# EAGLE board SolarCellX_v2alt (EAGLE 9.2.2)
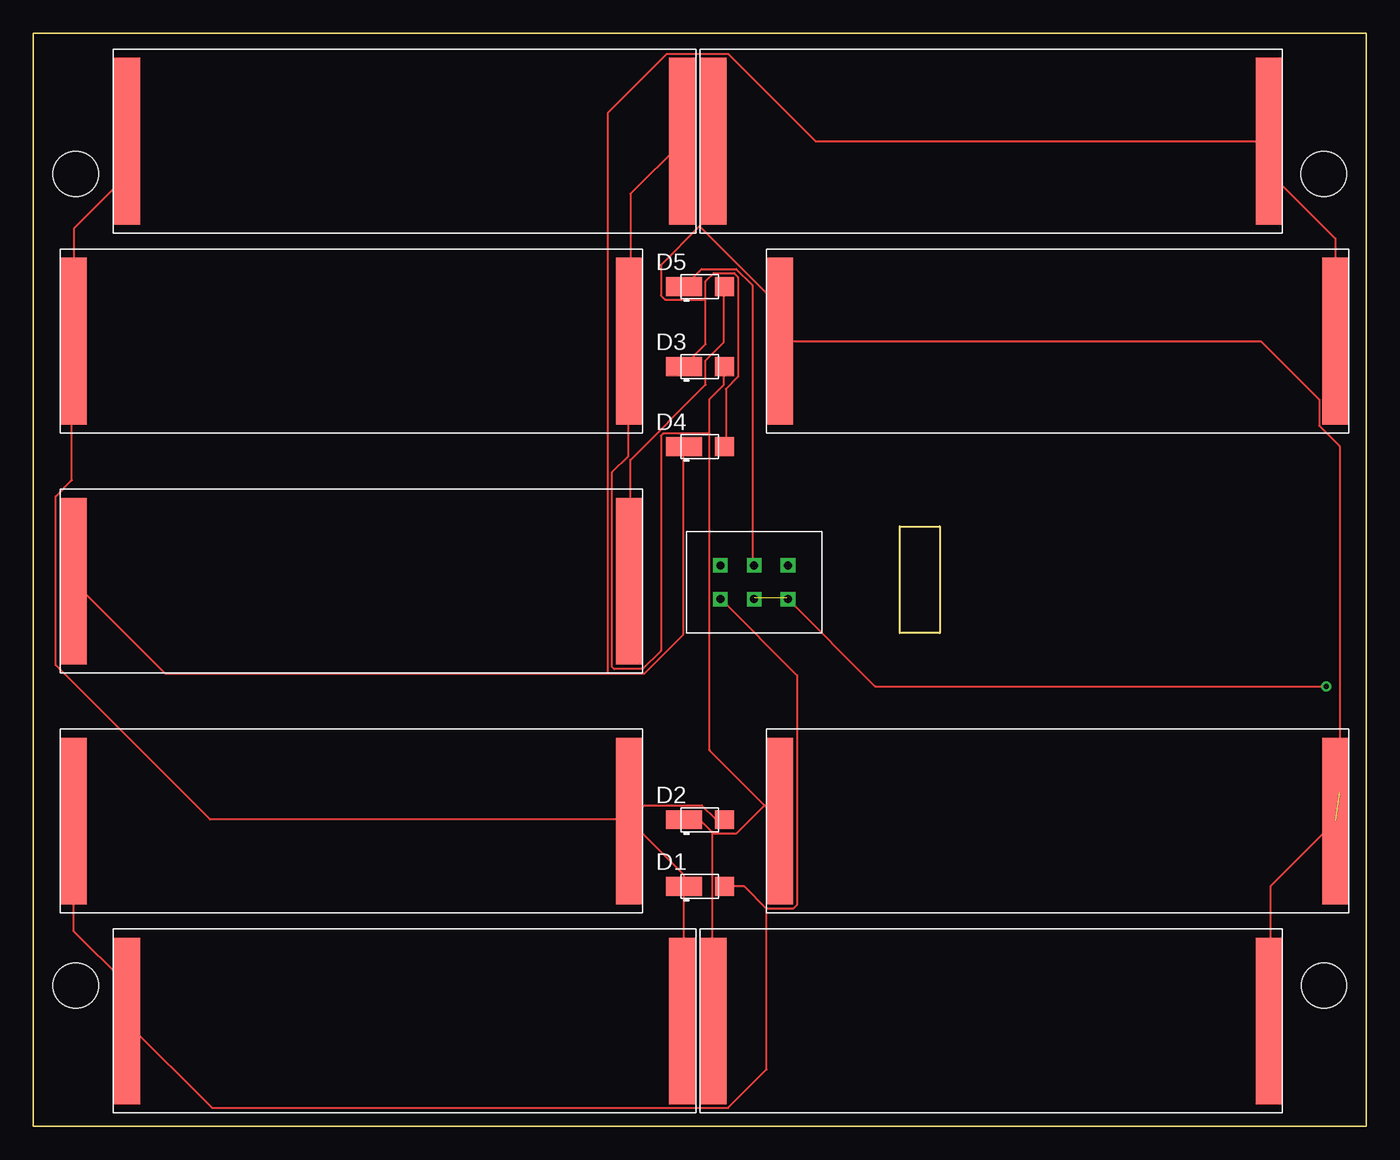
[diagram p0: board, top side]
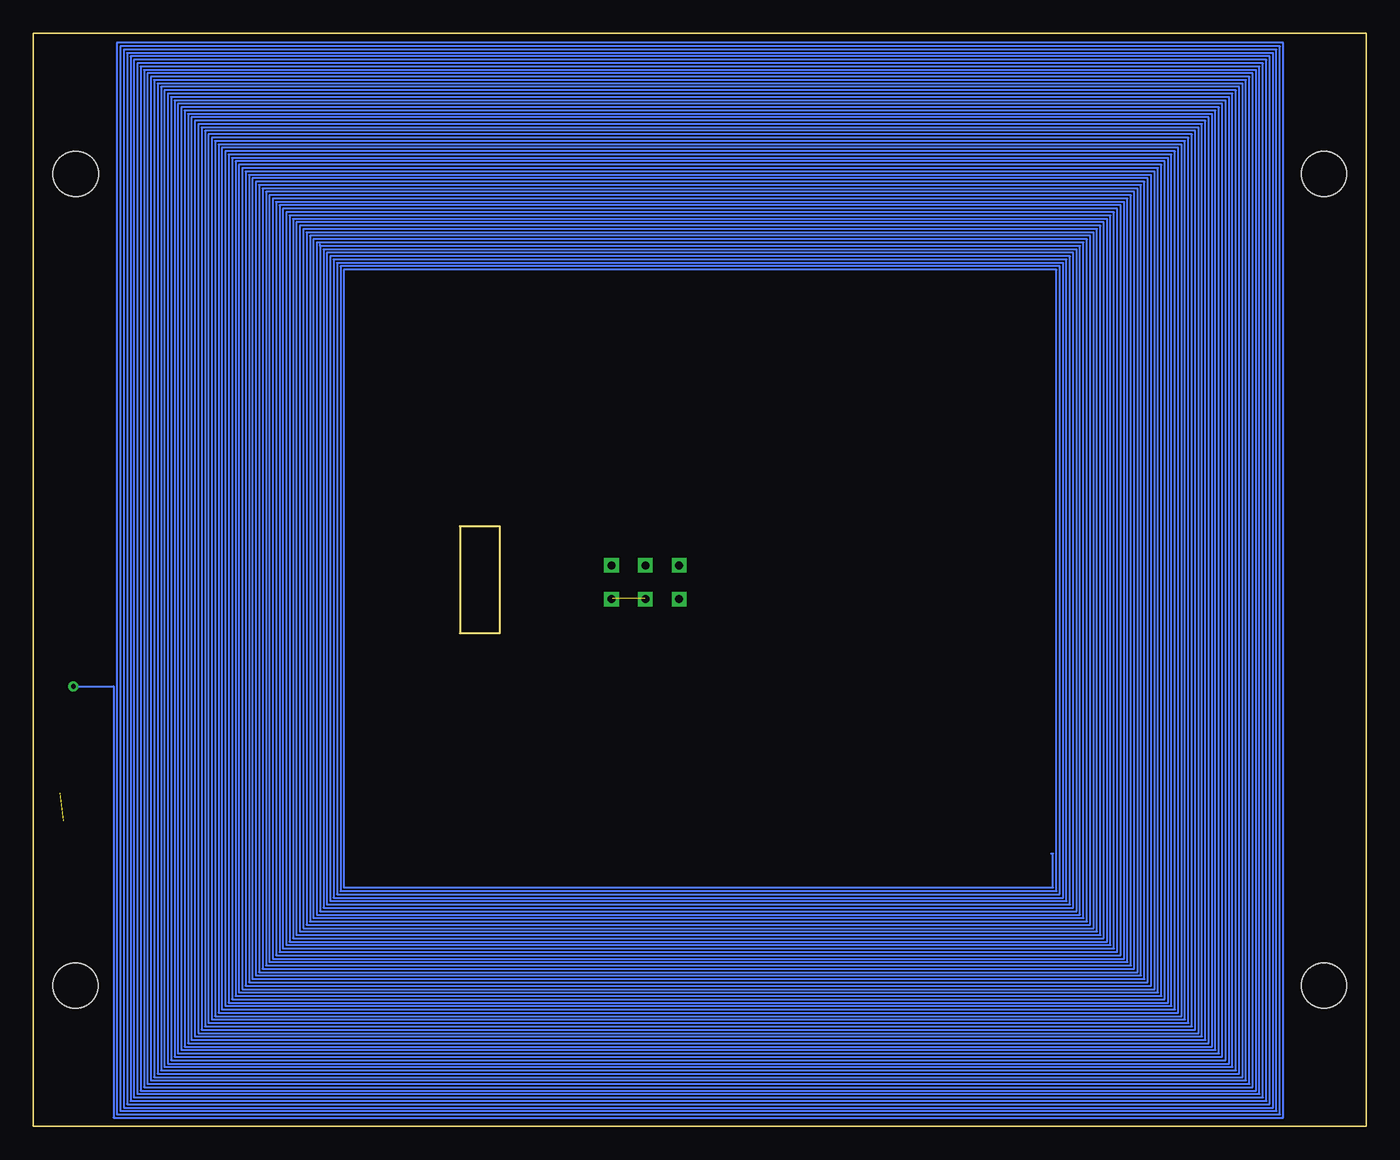
[diagram p1: board, bottom side, seen from below]

Size 100 x 82 mm. Coordinates in mm from the lower left corner, seen from the top.
Outline: 0,0 0,82 100,82 100,0 0,0
Outline: 65,45 68,45 68,37 65,37 65,45
Copper layers ([2:1+2*15+16:15]): Top 0.035559375mm / dielectric 0.17018125mm / Route2 0.01778125mm / dielectric 47mil / Route15 0.01778125mm / dielectric 0.17018125mm / Bottom 0.035559375mm
Design rules "default *": minimum track width 6mil, minimum drill 0.35mm, track to track 5mil, track to pad 6mil, pad to pad 6mil, via to via 6mil, smd to smd 6mil, copper to edge 20mil, drill to drill 6mil, minimum pad ring 10mil, minimum via ring 8mil, stop-mask expansion 4mil, vias tented up to drill 0mil, thermal gap 10mil
Holes 3.4 mm at 3.17,10.55 96.82,71.45 3.17,71.45 96.83,10.55

## Footprints (pad centres in the part's own frame; a part is rotated, then mirrored left to right if it is on the bottom)
SLMD121H04L = smd 2 x 12.5: P$1 1,6.9; P$2 42.7,6.9
SB_DIODE = smd 2.7 x 1.4: NEG -1.2,0 | smd 1.4 x 1.4: POS 1.85,0
6PIN_MOLEX = drill 0.6 square: P$1 2.54,2.54; P$2 5.08,2.54; P$3 7.62,2.54; P$4 7.62,5.08; P$5 5.08,5.08; P$6 2.54,5.08

## Placement (x,y rotation side)
1  SLMD121H04L  [SLMD121H04L]  2,34 0 top
11  SLMD121H04L  [SLMD121H04L]  6,1 0 top
12  SLMD121H04L  [SLMD121H04L]  2,16 0 top
13  SLMD121H04L  [SLMD121H04L]  2,52 0 top
14  SLMD121H04L  [SLMD121H04L]  6,67 0 top
21  SLMD121H04L  [SLMD121H04L]  50,1 0 top
22  SLMD121H04L  [SLMD121H04L]  55,16 0 top
23  SLMD121H04L  [SLMD121H04L]  55,52 0 top
24  SLMD121H04L  [SLMD121H04L]  50,67 0 top
D1  SB_DIODE  [SB_DIODE]  50,18 0 top
D2  SB_DIODE  [SB_DIODE]  50,23 0 top
D3  SB_DIODE  [SB_DIODE]  50,57 0 top
D4  SB_DIODE  [SB_DIODE]  50,51 0 top
D5  SB_DIODE  [SB_DIODE]  50,63 0 top
U$1  6PIN_MOLEX  [6PIN_MOLEX]  49,37 0 top

## Library data of the parts
1 11-14 21-24 D1-D5 U$1 = Solar

## Nets
GND: 11.P$1 12.P$1 D1.POS U$1.P$1
N$1: U$1.P$2 U$1.P$3
N$2: 11.P$2 12.P$2 13.P$1 14.P$1 D1.NEG D2.POS
N$3: 13.P$2 14.P$2 21.P$1 22.P$1 D2.NEG D3.POS
N$4: 1.P$1 23.P$2 24.P$2 D4.NEG
N$5: 21.P$2 22.P$2 23.P$1 24.P$1 D3.NEG D4.POS
N$6: 1.P$2 D5.POS
V_SOLAR: D5.NEG U$1.P$5

## Tracks (layer width: path | path; a pad name or v marks a point on that pad's centre or on a via)
GND
  Top 0.152: 55.02,16.31 53.34,17.98 51.97,17.98 D1.POS | 55.02,16.31 57,16.31 57.3,16.61 57.3,33.83 51.66,39.47 U$1.P$1 | 55.02,16.31 55.02,4.27 52.12,1.37 13.41,1.37 7.01,7.77 11.P$1 6.86,7.92 6.86,10.82 3.05,14.63 3.05,22.86 12.P$1
N$1  (via drill 0.35)  (1 unrouted)
  Top 0.152: 54.1,39.62 U$1.P$2 | 56.54,39.62 U$1.P$3 63.16,33 v97,33
  Bottom 0.152: v97,33 93.98,33 93.98,0.65 6.22,0.65 6.22,81.28 93.73,81.28 93.73,0.89 6.48,0.89 6.48,81.03 93.47,81.03 93.47,1.14 6.73,1.14 6.73,80.77 93.22,80.77 93.22,1.4 6.99,1.4 6.99,80.52 92.96,80.52 92.96,1.65 7.24,1.65 7.24,80.26 92.71,80.26 92.71,1.91 7.49,1.91 7.49,80.01 92.46,80.01 92.46,2.16 7.75,2.16 7.75,79.76 92.2,79.76 92.2,2.41 8,2.41 8,79.5 91.95,79.5 91.95,2.67 8.26,2.67 8.26,79.25 91.69,79.25 91.69,2.92 8.51,2.92 8.51,78.99 91.44,78.99 91.44,3.17 8.76,3.17 8.76,78.74 91.19,78.74 91.19,3.43 9.02,3.43 9.02,78.49 90.93,78.49 90.93,3.68 9.27,3.68 9.27,78.23 90.68,78.23 90.68,3.94 9.53,3.94 9.53,77.98 90.42,77.98 90.42,4.19 9.78,4.19 9.78,77.72 90.17,77.72 90.17,4.45 10.03,4.45 10.03,77.47 89.92,77.47 89.92,4.7 10.29,4.7 10.29,77.22 89.66,77.22 89.66,4.95 10.54,4.95 10.54,76.96 89.41,76.96 89.41,5.21 10.79,5.21 10.79,76.71 89.15,76.71 89.15,5.46 11.05,5.46 11.05,76.45 88.9,76.45 88.9,5.71 11.3,5.71 11.3,76.2 88.65,76.2 88.65,5.97 11.56,5.97 11.56,75.95 88.39,75.95 88.39,6.22 11.81,6.22 11.81,75.69 88.14,75.69 88.14,6.48 12.06,6.48 12.06,75.44 87.88,75.44 87.88,6.73 12.32,6.73 12.32,75.18 87.63,75.18 87.63,6.99 12.57,6.99 12.57,74.93 87.38,74.93 87.38,7.24 12.83,7.24 12.83,74.68 87.12,74.68 87.12,7.49 13.08,7.49 13.08,74.42 86.87,74.42 86.87,7.75 13.34,7.75 13.34,74.17 86.61,74.17 86.61,8 13.59,8 13.59,73.91 86.36,73.91 86.36,8.26 13.84,8.26 13.84,73.66 86.11,73.66 86.11,8.51 14.1,8.51 14.1,73.41 85.85,73.41 85.85,8.76 14.35,8.76 14.35,73.15 85.6,73.15 85.6,9.02 14.61,9.02 14.61,72.9 85.34,72.9 85.34,9.27 14.86,9.27 14.86,72.64 85.09,72.64 85.09,9.53 15.11,9.53 15.11,72.39 84.84,72.39 84.84,9.78 15.37,9.78 15.37,72.14 84.58,72.14 84.58,10.03 15.62,10.03 15.62,71.88 84.33,71.88 84.33,10.29 15.88,10.29 15.88,71.63 84.07,71.63 84.07,10.54 16.13,10.54 16.13,71.37 83.82,71.37 83.82,10.79 16.38,10.79 16.38,71.12 83.57,71.12 83.57,11.05 16.64,11.05 16.64,70.87 83.31,70.87 83.31,11.3 16.89,11.3 16.89,70.61 83.06,70.61 83.06,11.56 17.14,11.56 17.14,70.36 82.8,70.36 82.8,11.81 17.4,11.81 17.4,70.1 82.55,70.1 82.55,12.06 17.65,12.06 17.65,69.85 82.3,69.85 82.3,12.32 17.91,12.32 17.91,69.6 82.04,69.6 82.04,12.57 18.16,12.57 18.16,69.34 81.79,69.34 81.79,12.83 18.41,12.83 18.41,69.09 81.53,69.09 81.53,13.08 18.67,13.08 18.67,68.83 81.28,68.83 81.28,13.34 18.92,13.34 18.92,68.58 81.03,68.58 81.03,13.59 19.18,13.59 19.18,68.33 80.77,68.33 80.77,13.84 19.43,13.84 19.43,68.07 80.52,68.07 80.52,14.1 19.68,14.1 19.68,67.82 80.26,67.82 80.26,14.35 19.94,14.35 19.94,67.56 80.01,67.56 80.01,14.61 20.19,14.61 20.19,67.31 79.76,67.31 79.76,14.86 20.45,14.86 20.45,67.06 79.5,67.06 79.5,15.11 20.7,15.11 20.7,66.8 79.25,66.8 79.25,15.37 20.95,15.37 20.95,66.55 78.99,66.55 78.99,15.62 21.21,15.62 21.21,66.29 78.74,66.29 78.74,15.88 21.46,15.88 21.46,66.04 78.49,66.04
  Bottom 0.152: 78.49,66.04 78.49,66.17 | 78.49,66.04 78.49,16.13 21.72,16.13 21.72,65.79 78.23,65.79 78.23,16.38 21.97,16.38 21.97,65.53 77.98,65.53 77.98,16.64 22.23,16.64 22.23,65.28 77.72,65.28 77.72,16.89 22.48,16.89 22.48,65.02 77.47,65.02 77.47,17.14 22.73,17.14 22.73,64.77 77.22,64.77 77.22,17.4 22.99,17.4 22.99,64.52 76.96,64.52 76.96,17.65 23.24,17.65 23.24,64.26 76.71,64.26 76.71,17.91 23.5,17.91 23.5,20.45 23.62,20.45
N$2
  Top 0.152: 14.P$1 6.86,73.76 6.86,71.17 3.05,67.36 3.05,58.98 13.P$1 2.9,58.83 2.9,48.46 1.68,47.24 1.68,34.59 13.26,23.01 44.65,23.01 12.P$2 | D2.POS 51.82,23.01 51.21,23.01 50.14,24.08 45.87,24.08 44.81,23.01 12.P$2 | 12.P$2 44.81,22.86 48.77,18.9 48.77,18.14 D1.NEG 48.77,17.98 48.77,7.92 11.P$2
N$3
  Top 0.152: 14.P$2 48.62,73.76 44.81,69.95 44.81,58.98 13.P$2 44.65,58.83 44.65,50.29 43.43,49.07 43.43,34.44 43.59,34.29 45.72,34.29 47.09,35.66 47.09,51.82 47.24,51.97 50.75,51.97 | 50.75,51.97 50.75,28.19 54.86,24.08 | 50.75,51.97 50.75,54.56 51.82,55.63 51.82,57 D3.POS | 54.86,24.08 55.93,23.01 22.P$1 | 50.9,22.1 51.05,21.95 52.73,21.95 54.86,24.08 | 50.9,22.1 50.14,22.86 48.92,22.86 D2.NEG | 50.9,22.1 50.9,7.92 21.P$1
N$4
  Top 0.152: 23.P$2 97.69,58.98 97.69,66.6 92.81,71.48 92.81,73.76 24.P$2 92.66,73.91 58.67,73.91 52.12,80.47 47.55,80.47 43.13,76.05 43.13,33.98 | 43.13,33.98 9.91,33.98 3.05,40.84 1.P$1 | 43.13,33.98 45.87,33.98 48.77,36.88 48.77,50.9 D4.NEG
N$5  (1 unrouted)
  Top 0.152: 21.P$2 92.81,7.92 92.81,17.98 97.69,22.86 22.P$2 | 50.44,62.03 50.44,58.67 48.92,57.15 D3.NEG | 50.44,62.03 50.44,63.4 51.05,64.01 52.58,64.01 52.88,63.7 52.88,56.24 51.97,55.32 51.97,51.05 D4.POS | 50.44,62.03 47.4,62.03 47.09,62.33 47.09,64.62 49.99,67.51 | 49.99,67.51 50.9,68.43 50.9,73.76 24.P$1 | 49.99,67.51 55.93,61.57 55.93,58.98 23.P$1 | 56.08,58.98 23.P$1 | 23.P$1 92.1,58.9 96.47,54.53 96.47,52.55 98,51.03 98,25
N$6
  Top 0.152: D5.POS 51.82,62.94 51.82,58.83 50.44,57.45 50.44,55.63 44.81,49.99 44.81,41 1.P$2
V_SOLAR
  Top 0.152: U$1.P$5 53.95,42.22 53.95,63.09 52.73,64.31 50.14,64.31 48.92,63.09 D5.NEG